# Altium PCB Capteur_Couleur.PcbDoc
Units mm, origin at the board's own origin, x right, y up, seen from the top; angles counter-clockwise.
Board outline 10.5 x 74.7 mm, 4 copper layers (Component Side, Ground Plane, Power Plane, Solder Side), stack 0.844 mm thick; 90 components, 63 nets, 286 pads, 137 vias.
Unrouted connection lines stored in the file: 4.
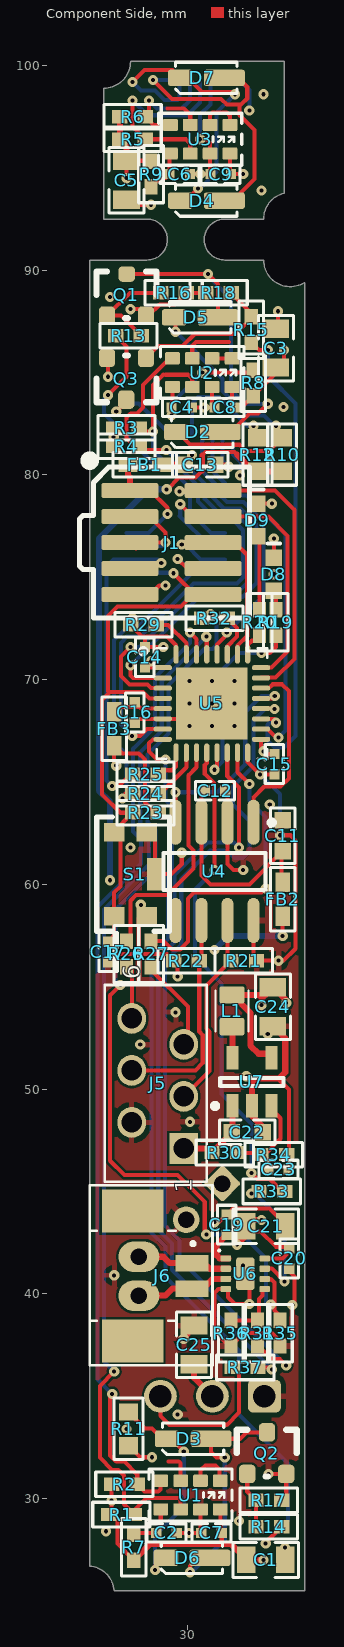
[diagram p0: Component Side view]
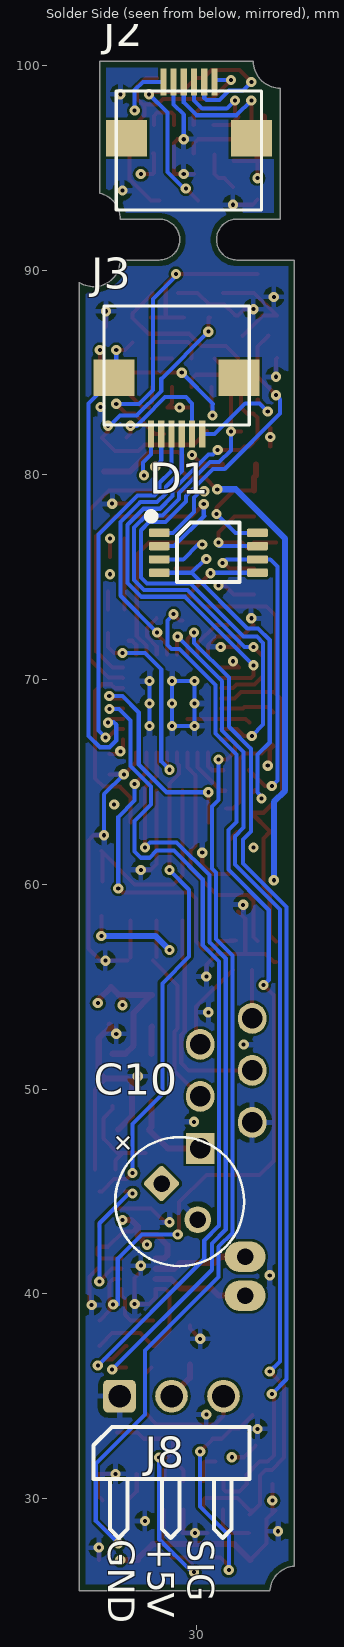
[diagram p1: Solder Side view, seen from below]
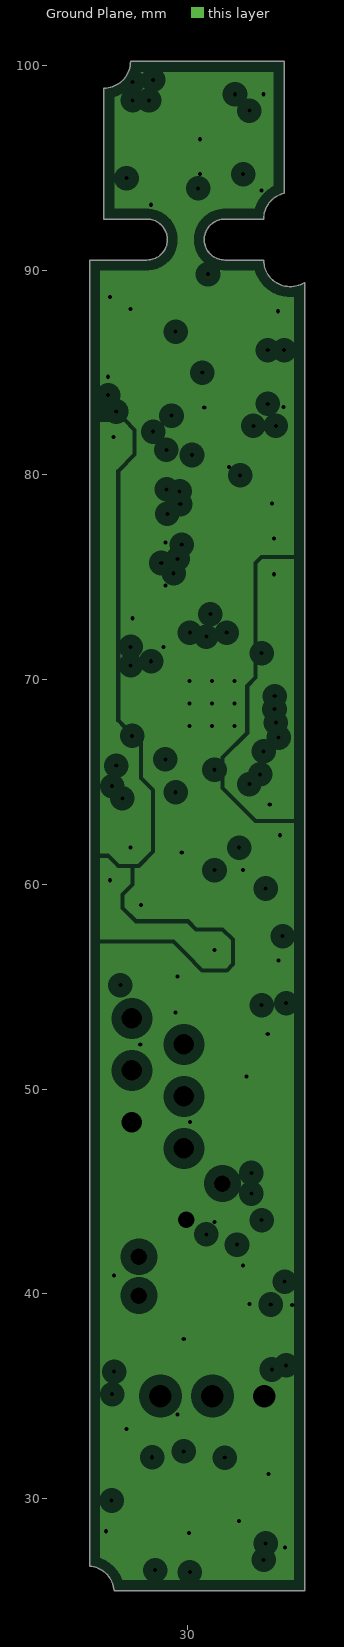
[diagram p2: Ground Plane, clearances drawn from the general rule]
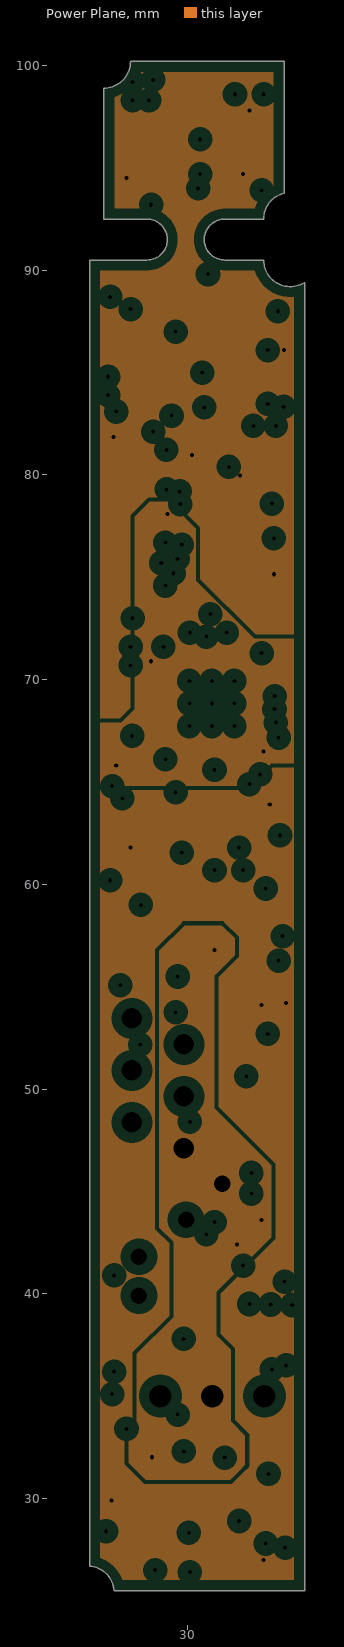
[diagram p3: Power Plane, clearances drawn from the general rule]
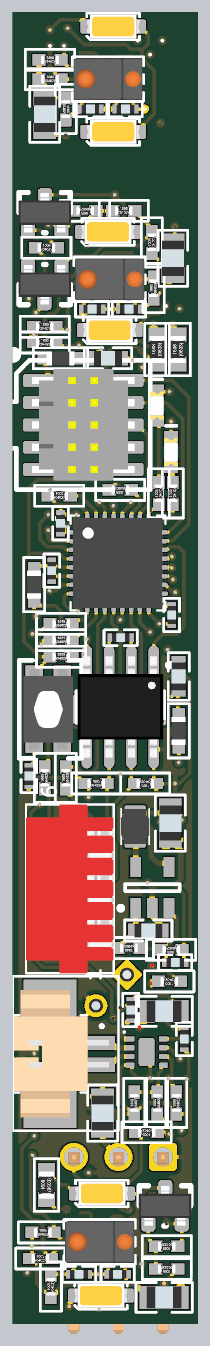
[diagram p4: 3D render of the assembled board from above, using the file's embedded part models]
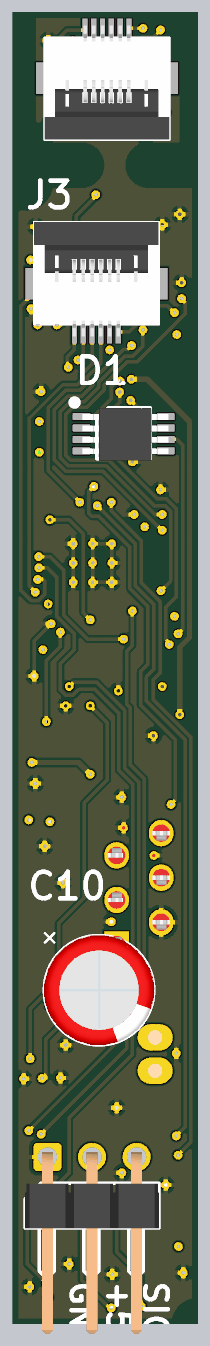
[diagram p5: 3D render of the assembled board from below, using the file's embedded part models]

## Layer stack, top to bottom
Top Solder: solder mask 0.0102, Solder Resist, Dk 3.5
Component Side: signal copper 0.0356
Dielectric 1: core 0.32, FR-4, Dk 4.8
Ground Plane: plane copper 0.036, net (Multiple Nets)
Dielectric 3: prepreg 0.127, Dk 4.2
Power Plane: plane copper 0.036, net (Multiple Nets)
Dielectric 4: core 0.254, Dk 4.2
Solder Side: signal copper 0.0356
Bottom Solder: solder mask 0.0102, Solder Resist, Dk 3.5

## Board outline
26.396,25.5 ccw(c25.1,25.4) 25.2,26.696 25.2,90.5 28,90.5 ccw(c28,91.5) 28,92.5 25.9,92.5 25.9,98.9 ccw(c25.9,100.2) 27.2,100.2 34.7,100.2 34.7,93.784 34.704,93.766 ccw(c35,92.5) 33.7,92.5 31.8,92.5 ccw(c31.8,91.5) 31.8,90.5 33.7,90.5 ccw(c35,90.5) 35.698,89.403 35.7,89.4 35.7,25.5

## Design rules (kind name [scope] priority, off if disabled: settings)
AssemblyTestPointUsage [All] p1 off:
AssemblyTestpoint [All] p1 off: testpointundercomponent=TRUE minsize=1.016 maxsize=2.54 preferedsize=1.524 minholesize=0 maxholesize=1.016 preferedholesize=0.813 testpointgrid=0.025 usegrid=TRUE gridtolerance=0 allowsidetop=TRUE allowsidebottom=TRUE
BoardOutlineClearance [All] p1: gap=0.3
Clearance [All] p1: gap=0.125
ComponentClearance [All] p1: gap=0.2 collisioncheckmode=3 verticalgap=1 showdistances=FALSE
DiffPairsRouting [All] p1 off: maxlimit=0.254 minlimit=0.254 mostfreqgap=0.254 toplayer_minwidth=0.381 toplayer_maxwidth=0.381 toplayer_prefwidth=0.381 bottomlayer_minwidth=0.381 bottomlayer_maxwidth=0.381 bottomlayer_prefwidth=0.381 maxuncoupledlength=12.7
FabricationTestPointUsage TestPointUsage [All] p1 off: valid=0 allowmultiple=FALSE
FabricationTestpoint Testpoint [All] p1 off: side=3 testpointundercomponent=TRUE minsize=1.016 maxsize=2.54 preferedsize=1.524 minholesize=0 maxholesize=1.016 preferedholesize=0.813 testpointgrid=0.025 allowsidetop=TRUE allowsidebottom=TRUE usegrid=TRUE gridtolerance=0
FanoutControl Fanout_BGA [IsBGA] p1 off: bgadir=Out bgaviamode=Centered fanoutstyle=Auto fanoutdirection=Alternating viagrid=0.025 // Fanout_BGA (Default Rule)
FanoutControl Fanout_LCC [IsLCC] p2 off: bgadir=Out bgaviamode=Centered fanoutstyle=Auto fanoutdirection=Alternating viagrid=0.025 // Fanout_LCC (Default Rule)
FanoutControl Fanout_SOIC [IsSOIC] p3 off: bgadir=Out bgaviamode=Centered fanoutstyle=Auto fanoutdirection=Alternating viagrid=0.025 // Fanout_SOIC (Default Rule)
FanoutControl Fanout_Small [(CompPinCount < 5)] p4 off: bgadir=Out bgaviamode=Centered fanoutstyle=Auto fanoutdirection=OutThenIn viagrid=0.025 // Fanout_Small (Default Rule)
FanoutControl Fanout_Default [All] p5 off: bgadir=Out bgaviamode=Centered fanoutstyle=Auto fanoutdirection=Alternating viagrid=0.025 // Fanout_Default (Default Rule)
Height [All] p1: minheight=0 maxheight=13 prefheight=10
HoleSize [All] p1: absolutevalues=TRUE maxlimit=6 minlimit=0.15 maxpercent=80.000 minpercent=20.000
HoleToHoleClearance [All] p1: gap=0.4 allowstackedmicrovias=TRUE
MinimumAnnularRing [All] p1: minimumring=0.15
MinimumSolderMaskSliver [All] p1: minsoldermaskwidth=0.15
MinimumSolderMaskSliver SilkscreenOverComponentPads [All] p2 off: minsoldermaskwidth=0.254
NetAntennae [All] p1 off: netantennaetolerance=0
PlaneClearance [All] p1: clearance=0.5
PlaneConnect [All] p1: planeconnectstyle=Relief reliefexpansion=0.4 reliefentries=4 reliefconductorwidth=0.3 reliefairgap=0.2
PolygonConnect [All] p1: connectstyle=Relief reliefconductorwidth=0.25 reliefentries=4 polygonreliefangle="90 Angle" airgapwidth=0.254
RoutingCorners [All] p1: cornerstyle=45-Degree minsetback=1.5 maxsetback=2.54
RoutingVias [All] p1: holewidth=0.2 width=0.5 viastyle="Through Hole" minholewidth=0.2 minwidth=0.4 maxholewidth=0.2 maxwidth=0.6
SilkToSilkClearance [All] p1 off: silktosilkclearance=0.1
SolderMaskExpansion [All] p1: expansion=0.075
Width [All] p1: maxlimit=4 minlimit=0.125 preferedwidth=0.2
10 further rules are at their usual default settings.

## Components (designator, comment, footprint, x,y, rotation, side; value= is the part's Value field where it differs from the comment)
C1 "10uF" "WCAP-CSGP_0805, 2x1.25x1.25" 33.8,27 r180 top
C2 "1uF" "WCAP-CSGP_0402, 1x0.5x0.5" 28.952,28.316 r180 top
C3 "10uF" "WCAP-CSGP_0805, 2x1.25x1.25" 34.3,86.2 r270 top
C4 "1uF" "WCAP-CSGP_0402, 1x0.5x0.5" 29.7,83.3 r180 top
C5 "10uF" "WCAP-CSGP_0805, 2x1.25x1.25" 27,94.4 r90 top
C6 "1uF" "WCAP-CSGP_0402, 1x0.5x0.5" 29.6,94.7 r180 top
C7 "1uF" "WCAP-CSGP_0402, 1x0.5x0.5" 31.153,28.316 r0 top
C8 "1uF" "WCAP-CSGP_0402, 1x0.5x0.5" 31.8,83.3 r0 top
C9 "1uF" "WCAP-CSGP_0402, 1x0.5x0.5" 31.6,94.7 r0 top
C10 "220 uF" WCAP-ATG8_6.3x11x2.5x0.5 30.8,44.5 r45 bottom
C11 "1uF" "WCAP-CSGP_0603, 1.6x0.8x0.8" 34.63,62.375 r270 top
C12 "100nF" "WCAP-CSGP_0402, 1x0.5x0.5" 31.33,64.575 r180 top
C13 "1uF" "WCAP-CSGP_0603, 1.6x0.8x0.8" 30.6,80.5 r180 top
C14 "100nF" "WCAP-CSGP_0402, 1x0.5x0.5" 27.9,71.1 r270 top
C15 "100nF" "WCAP-CSGP_0402, 1x0.5x0.5" 34.23,65.875 r90 top
C16 "100nF" "WCAP-CSGP_0402, 1x0.5x0.5" 27.4,68.4 r90 top
C17 "100nF" "WCAP-CSGP_0402, 1x0.5x0.5" 26.1,56.7 r90 top
C19 "100nF" "WCAP-CSGP_0402, 1x0.5x0.5" 31.904,43.375 r270 top
C20 "100nF" "WCAP-CSGP_0402, 1x0.5x0.5" 34.95,41.725 r90 top
C21 "10uF" "WCAP-CSGP_0805, 2x1.25x1.25" 33.8,43.3 r180 top
C22 "4.7uF" "WCAP-CSGP_0603, 1.6x0.8x0.8" 32.9,47.9 r180 top
C23 "100nF" "WCAP-CSGP_0402, 1x0.5x0.5" 34.43,46.075 r180 top
C24 "10uF" "WCAP-CSGP_0805, 2x1.25x1.25" 34.155,54.023 r90 top
C25 "10uF" "WCAP-CSGP_0805, 2x1.25x1.25" 30.3,37.5 r270 top
D1 "82401646" MSOP-8L 29.4,76.2 r180 bottom
D2 "158301227" WL-SWTP_3014 30.7,82.1 r0 top
D3 "158301227" WL-SWTP_3014 30.252,32.916 r0 top
D4 "158301227" WL-SWTP_3014 30.9,93.4 r0 top
D5 "158301227" WL-SWTP_3014 30.6,87.7 r0 top
D6 "158301227" WL-SWTP_3014 30.2,27.1 r0 top
D7 "158301227" WL-SWTP_3014 30.9,99.4 r0 top
D8 "Jaune" 0603 34.2,75.15 r270 top
D9 "Blue" 0603 33.4,77.8 r270 top
FB1 "742792624" "WE-CBF_0603_High Current" 27.9,80.5 r180 top
FB2 "742792624" "WE-CBF_0603_High Current" 34.63,59.275 r90 top
FB3 "742792624" "WE-CBF_0603_High Current" 26.4,67.6 r90 top
J1 "FTSH-105-01-L-DV-K" FTSH-105-01-L-DV-K 29.2,76.7 r270 top
J2 "687106149022" 687106149022 31.6,99.2 r180 bottom
J3 "687106149022" 687106149022 29.7,82 r0 bottom
J5 "690368170672" 690368170672 28.53,50.275 r90 top
J6 "653102131822" 653102131822 28.75,40.875 r270 top
J8 "61300311021" 61300311021 31.2,35 r180 bottom
L1 "74404020022" WE-LQS_2010 32.155,53.823 r90 top
Q1 "IRLML2502" SOT-23#1 27,88.8 r0 top
Q2 "IRLML2502" SOT-23#2 33.853,32.216 r0 top
Q3 "IRLML2502" SOT-23#2 27,84.7 r180 top
R1 "Manufacturer Part Number" RESC1005X04N 26.753,29.216 r0 top
R2 "Manufacturer Part Number" RESC1005X04N 26.9,30.7 r0 top
R3 "Manufacturer Part Number" RESC1005X04N 27,82.3 r0 top
R4 "Manufacturer Part Number" RESC1005X04N 27,81.4 r0 top
R5 "Manufacturer Part Number" RESC1005X04N 27.3,96.4 r0 top
R6 "Manufacturer Part Number" RESC1005X04N 27.3,97.5 r0 top
R7 "RC0402FR-0722RL" RESC1005X04N 27.353,27.616 r90 top
R8 "RC0402FR-0722RL" RESC1005X04N 33.2,84.5 r90 top
R9 "RC0402FR-0722RL" RESC1005X04N 28.2,94.7 r270 top
R10 "RC0603FR-0768RL" RESC1608X06N 34.6,81 r90 top
R11 "RC0603FR-0768RL" RESC1608X06N 27.1,33.4 r90 top
R12 "RC0603FR-0768RL" RESC1608X06N 33.4,81 r90 top
R13 "RC0402FR-0710RL" RESC1005X04N 27.1,86.8 r0 top
R14 "RC0402FR-0710RL" RESC1005X04N 33.953,28.616 r180 top
R15 "RC0402FR-0710RL" RESC1005X04N 33.1,87.1 r90 top
R16 "RC0402FR-0710KL" RESC1005X04N 29.3,88.9 r180 top
R17 "RC0402FR-0710KL" RESC1005X04N 33.953,29.916 r180 top
R18 "RC0402FR-0710KL" RESC1005X04N 31.5,88.9 r0 top
R19 "RC0402FR-07100RL" RESC1005X04N 34.3,72.8 r90 top
R20 "RC0402FR-0710RL" RESC1005X04N 33.5,72.8 r90 top
R21 "RC0402FR-0762RL" RESC1005X04N 32.73,56.275 r180 top
R22 "RC0402FR-0762RL" RESC1005X04N 29.93,56.275 r0 top
R23 "RC0402FR-0710KL" RESC1005X04N 27.93,63.5 r0 top
R24 "RC0402FR-0710RL" RESC1005X04N 27.93,64.438 r0 top
R25 "RC0402FR-0710RL" RESC1005X04N 27.93,65.375 r0 top
R26 "RC0402FR-0710RL" RESC1005X04N 27,56.6 r90 top
R27 "RC0402FR-0710RL" RESC1005X04N 28.2,56.6 r90 top
R29 "RC0402FR-0710KL" RESC1005X04N 27.83,72.675 r0 top
R30 "RC0402FR-0710KL" RESC1005X04N 31.8,46.9 r180 top
R31 "RC0402FR-0710RL" RESC1005X04N 33.404,38.075 r90 top
R32 "RC0402FR-0710RL" RESC1005X04N 31.3,73 r180 top
R33 "RC0402FR-0710RL" RESC1005X04N 34.1,45 r180 top
R34 "Manufacturer Part Number" RESC1005X04N 34.2,46.8 r180 top
R35 "RC0402FR-0710KL" RESC1005X04N 34.5,38.075 r90 top
R36 "RC0402FR-0710KL" RESC1005X04N 32.104,38.075 r90 top
R37 "RC0402FR-0710RL" RESC1005X04N 32.8,36.4 r180 top
S1 "MCITPG" MCIPTG23K-V 27.2,60.5 r270 top
U1 "APDS-9960" APDS996X 30.131,30.167 r90 top
U2 "APDS-9960" APDS996X 30.7,85 r90 top
U3 "APDS-9960" APDS996X 30.6,96.4 r90 top
U4 "MCP2551-I/SN" SO8_N 31.3,60.635 r270 top
U5 "STM32F302K8U6" QFN50P500X500X60_HS-33N 31.173,68.837 r0 top
U6 "DRV8838DSGT" PSON50P200X80_HS-9N 32.804,40.975 r0 top
U7 "LM3671MF-3.3/NOPB" SOT23-5 33.13,50.35 r90 top

## Footprints (in the part's own frame and the unit in brackets; to place one, negate y for a bottom-side part, rotate by r counter-clockwise, add the part's x,y. Pads: shape width x height; smd on the part's side, far side on the other; paste and mask are expansions set on the pad)
0603 [mm] "Chip LED, 2-Leads, Body 1.6x0.8mm, IPC Medium Density"
  rect 0.8x0.8 smd: 1(-0.8,0) 2(0.8,0)
  silkscreen extent -1.5,-0.3 -1.5,0.3, body extent -0.8,-0.4 0.8,0.4, height 0.7
61300311021 [mm] "3 pins, 1 row, right angled, gold plating"
  rrect30% 1.6x1.6 hole 1.1: 1(-2.54,0)
  round 1.6 hole 1.1: 2(0,0) 3(2.54,0)
  silkscreen extent -3.81,-6.92 3.81,-1.5, body extent -3.81,-10.06 3.81,0.3, height 2.55
653102131822 [mm] "SMT Male Horizontal Shrouded Header - 02p 1 row - T & R packaging"
  rect 0.81x1.6 smd: 1(-0.625,1.45) 2(0.625,1.45)
  rect 2.1x3 smd: Z1(-3.175,-1.45) Z2(3.175,-1.45)
  silkscreen extent -4.43,-3.55 4.38,2.45, body extent -3.62,-3.5 3.63,1.91, height 3.38
687106149022 [mm] "WR-FPC 0.50mm SMT Horiz. Bot. Contact Hinge type WR-FPC 0.50mm 6pins Hinge type SMT Horizontal Bottom Contact"
  rect 0.3x1.3 smd: 1(0,0) 2(0.5,0) 3(1,0) 4(1.5,0) 5(2,0) 6(2.5,0)
  rect 2x1.8 smd: Z1(-1.8,-2.75) Z2(4.3,-2.75)
  silkscreen extent -2.3,-6.25 4.8,-0.45, body extent -2.3,-6.25 4.8,0.25, height 2.25
690368170672 [mm] "without Latch, 6 pins, right angled"
  rect 1.5x1.4 hole 1: 1(-3.175,-1.27)
  oval 1.5x1.4 hole 1: 2(-1.905,1.27) 3(-0.635,-1.27) 4(0.635,1.27) 5(1.905,-1.27) 6(3.175,1.27)
  silkscreen extent -4.81,-2.4 4.81,2.6, body extent -4.81,-2.4 4.81,2.6, height 5.9
APDS996X [mm]
  rrect20% 0.6x0.72 smd: 1(0.7,1.455) 2(0.7,0.485) 3(0.7,-0.485) 4(0.7,-1.455) 5(-0.7,-1.455) 6(-0.7,-0.485) 7(-0.7,0.485) 8(-0.7,1.455)
  silkscreen extent -1.27,-2.03 1.27,2.03, body extent -1.18,-1.97 1.18,1.97, height 1.34
FTSH-105-01-L-DV-K [mil] "CONN HEADER 10 POS DUAL .05\" SMD"
  rrect30% 29x110 smd mask+2: 1(-100,-80) 2(-100,80) 3(-50,-80) 4(-50,80) 5(0,-80) 6(0,80) 7(50,-80) 8(50,80) 9(100,-80) 10(100,80)
  silkscreen extent -165,-177 145,150, body extent -125,-115 125,115, height 241
MCIPTG23K-V [mm]
  rect 0.9x1 smd: 1(-2.05,0.8) 2(-2.05,-0.8) 3(2.05,0.8) 4(2.05,-0.8)
  rect 1.6x0.8 smd: 5(0,1.2)
  silkscreen extent -2.79,-1.65 2.79,1.91, body extent -2.3,-1.4 2.3,1.4, height 1.9
MSOP-8L [mm] "MSOP-8L, 8-Leads, Body 5x3mm, Pitch 0.5mm"
  rrect30% 1.016x0.406 smd: 1(-2.4,0.975) 2(-2.4,0.325) 3(-2.4,-0.325) 4(-2.4,-0.975) 5(2.4,-0.975) 6(2.4,-0.325) 7(2.4,0.325) 8(2.4,0.975)
  silkscreen extent -2.89,-1.43 1.52,1.88, body extent -2.35,-1.52 2.55,1.48, height 0.94
PSON50P200X80_HS-9N [mm] "PSON, 8-Leads, Body 2,00x2,00mm, Pitch 0,50mm, Thermal Pad 1,60x0,82mm, IPC Medium Density"
  rrect30% 0.5x0.3 smd: 1(-0.95,0.75) 2(-0.95,0.25) 3(-0.95,-0.25) 4(-0.95,-0.75) 5(0.95,-0.75) 6(0.95,-0.25) 7(0.95,0.25) 8(0.95,0.75)
  rrect30% 0.9x1.6 smd: 9(0,0)
  silkscreen extent -1.32,1.09 -1.22,1.19, body extent -1.05,-1.05 1.05,1.05, height 0.8
QFN50P500X500X60_HS-33N [mm] "QFN, 32-Leads, Body 5,00x5,00mm, Pitch 0,50mm, Thermal Pad 3,50x3,50mm, IPC Medium Density"
  oval 0.9x0.25 smd: 1(-2.4,1.75) 2(-2.4,1.25) 3(-2.4,0.75) 4(-2.4,0.25) 5(-2.4,-0.25) 6(-2.4,-0.75) 7(-2.4,-1.25) 8(-2.4,-1.75) 17(2.4,-1.75) 18(2.4,-1.25) 19(2.4,-0.75) 20(2.4,-0.25) 21(2.4,0.25) 22(2.4,0.75) 23(2.4,1.25) 24(2.4,1.75)
  oval 0.25x0.9 smd: 9(-1.75,-2.4) 10(-1.25,-2.4) 11(-0.75,-2.4) 12(-0.25,-2.4) 13(0.25,-2.4) 14(0.75,-2.4) 15(1.25,-2.4) 16(1.75,-2.4) 25(1.75,2.4) 26(1.25,2.4) 27(0.75,2.4) 28(0.25,2.4) 29(-0.25,2.4) 30(-0.75,2.4) 31(-1.25,2.4) 32(-1.75,2.4)
  rect 3.5x3.5 smd: 33(0,0)
  silkscreen extent -3.47,-2.7 2.7,2.7, body extent -2.57,-2.57 2.57,2.57, height 0.6
RESC1005X04N [mm] "Chip Resistor, 2-Leads, Body 1,1x0,5mm, IPC Medium Density"
  rect 0.75x0.65 smd: 1(-0.625,0) 2(0.625,0)
  silkscreen extent -1.4,-0.6 1.4,0.6, body extent -0.5,-0.25 0.5,0.25, height 0.35
RESC1608X06N [mm] "Chip Resistor, 2-Leads, Body 1,6x0,8mm, IPC Medium Density"
  rect 0.85x0.95 smd: 1(-0.825,0) 2(0.825,0)
  silkscreen extent -1.5,-0.7 1.5,0.7, body extent -0.77,-0.42 0.78,0.43, height 0.45
SO8_N [mm] "8-Pin Small Outline Integrated Circuit 1.27 mm Pitch, IPC Medium Density"
  oval 2.2x0.6 smd: 1(-2.4,1.905) 2(-2.4,0.635) 3(-2.4,-0.635) 4(-2.4,-1.905) 5(2.4,-1.905) 6(2.4,-0.635) 7(2.4,0.635) 8(2.4,1.905)
  silkscreen extent -2.51,-2.5 0.9,2.92, body extent -2.89,-2.45 2.89,2.46, height 1.75
SOT23-5 [mm] "SOT23, 5-Leads, Body 3,1x3,2mm (max), Pitch 0,95mm, IPC Medium Density"
  rect 1.15x0.6 smd: 1(-1.175,0.95) 2(-1.175,0) 3(-1.175,-0.95) 4(1.175,-0.95) 5(1.175,0.95)
  silkscreen extent -1.3,-1.55 0.2,1.92, body extent -0.9,-1.55 0.9,1.55, height 1.45
SOT-23#1 [mm]
  rrect50% 0.8x0.9 smd: 1(-0.953,-1.016) 2(0.953,-1.016)
  rrect50% 0.8x0.76 smd: 3(0.013,1.016)
  silkscreen extent -1.46,-1.14 1.46,1.14, body extent -1.5,-1.13 1.5,1.13, height 1.22
SOT-23#2 [mm]
  rrect50% 0.8x0.9 smd: 1(-0.953,-1.016) 2(0.953,-1.016) 3(0.013,1.016)
  silkscreen extent -1.46,-1.14 1.46,1.14, body extent -1.5,-1.13 1.5,1.13, height 1.22
WCAP-ATG8_6.3x11x2.5x0.5 [mm] "Polarized capacitors, Aluminum Electrolytic Capacitors, 2-Leads, Body 6.3x11x2.5x0.5"
  rrect20% 1.3x1.3 hole 0.8: 1(1.25,0)
  round 1.3 hole 0.8: 2(-1.25,0)
  silkscreen extent -3.15,-3.15 3.15,3.15, body extent -3.14,-3.15 3.15,3.15, height 11.11
"WCAP-CSGP_0402, 1x0.5x0.5" [mm] "WCAP-CSGP Ceramic Capacitors, size 0402, body 1x0.5x0.5"
  rect 0.5x0.5 smd: 1(-0.5,0) 2(0.5,0)
  silkscreen extent -0.95,-0.45 0.95,0.45, body extent -0.5,-0.25 0.5,0.25, height 0.5
"WCAP-CSGP_0603, 1.6x0.8x0.8" [mm] "WCAP-CSGP Ceramic Capacitors, size 0603, body 1.6x0.8x0.8"
  rect 0.8x0.8 smd: 1(-0.75,0) 2(0.75,0)
  silkscreen extent -1.35,-0.6 1.35,0.6, body extent -0.8,-0.4 0.8,0.4, height 0.8
"WCAP-CSGP_0805, 2x1.25x1.25" [mm] "WCAP-CSGP Ceramic Capacitors, size 0805, body 2x1.25x1.25"
  rect 0.9x1.3 smd: 1(-0.95,0) 2(0.95,0)
  silkscreen extent -1.6,-0.85 1.6,0.85, body extent -1,-0.62 1,0.63, height 1.22
"WE-CBF_0603_High Current" [mm] "SMD EMI Suppression Ferrite  Bead, body 1.6mmx0.8mm"
  rect 0.95x0.7 smd: 1(-0.825,0) 2(0.825,0)
  silkscreen extent -1.55,-0.6 1.55,0.6, body extent -0.8,-0.4 0.8,0.4, height 0.8
WE-LQS_2010 [mm] "SMD Power Inductor, 2-Leads, body 1.6x2.0mm"
  rrect20% 0.85x1.2 smd: 1(-0.775,0) 2(0.775,0)
  silkscreen extent -1,-0.8 1,0.8, body extent -1,-0.8 1,0.82, height 1
WL-SWTP_3014 [mm] "SMD White Top view PLCC, body 3x1.4"
  rrect30% 2x0.8 smd: 1(0.88,0)
  rrect30% 1.2x0.8 smd: 2(-1.27,0)
  silkscreen extent -1.5,-0.76 1.5,0.76, body extent -1.5,-0.7 1.5,0.7, height 0.85

## Part data
C1 C3 C5 C21 C24 C25: library part "WCAP-CSGP, 885012207026", "CAP CER 10uF 10V X7R 0805"
C2 C4 C6 C7 C8 C9: library part "WCAP-CSGP, 885012105012", "CAP CER 1UF 10V X5R 0402"
C10: library part "WCAP-ATG8, 860010373010", "CAP Alu 220 UF 20% 16 V"
C11 C13: library part "WCAP-CSGP, 885012206076", "CAP CER 1uF 25V X7R 0603"
C12 C14 C15 C16 C17 C19 C20 C23: library part "WCAP-CSGP, 885012205037", "CAP CER 100nF 16V X7R 0402"
C22: library part "WCAP-CSGP, 885012106012", "CAP CER 4.7UF 10V X5R 0603"
D1: "TVS DIODE 5VWM 13VC 8MSOP"
D2 D3 D4 D5 D6 D7: "LED WL-SWTP WARM WHT 2700K 1206"
D8: library part "WL-SMCW 0603  150060YS75000", "SMD mono-color Chip LED, WL-SMCW, Yellow"
D9: library part "WL-SMCW 0603  150060BS75000", "SMD mono-color Chip LED, WL-SMCW, Blue"
FB1 FB2 FB3: library part "WE-CBF, 742792624", "Ferrite Bead 180ohm 0603 max1.5A"
J1: "CONN HEADER 10 POS DUAL .05\" SMD with Keying"
J2 J3: "CONN .5MM HORZ BOTTOM SMD 6POS"
J5: "WR-MM 6p Female Angled TH Connector with Polarization"
J6: "WR-WTB 2 horiz. 1.25mm"
J8: "CONN HEADER 3p horiz. 2.54mm"
L1: "FIXED IND 2.2UH 960MA 220 MOHM"
Q1 Q2 Q3: "MOSFET CANAL N SOT-23"
R1 R2 R3 R4 R5 R6 R34: library part RC0402FR-074K7L, "RES SMD 4K7 OHM 1% 1/16W 0402"
R7 R8 R9: "RES SMD 22 OHM 1% 1/16W 0402"
R10 R11 R12: "RES SMD 68 OHM 1% 1/10W 0603"
R13 R14 R15 R20 R24 R25 R26 R27 R31 R32 R33 R37: "RES SMD 10 OHM 1% 1/16W 0402"
R16 R17 R18 R23 R29 R30 R35 R36: "RES SMD 10K OHM 1% 1/16W 0402"
R19: "RES SMD 100 OHM 1% 1/16W 0402"
R21 R22: "RES SMD 62 OHM 1% 1/16W 0402"
S1: library part MCIPTG23K-V, "Switch MCIPTG23K-V Multicomp"
U1 U2 U3: library part APDS9960, "Digital Proximity, Ambient Light, RGB and Gesture Sensor"
U4: "IC TRANSCEIVER CAN HI-SPD 8-SOIC"
U6: "IC BRIDGE DRIVER PAR 8WSON"
U7: "IC REG BUCK 3.3V 0.6A SYNC SOT23"

## Free pads (board coordinates)
  oval 2x1.5 hole 0.8: 3(27.604,39.911) 3(27.604,41.811)

## Via types
v1: diameter 0.5, hole 0.2, Component Side to Solder Side, tented top, 135 vias
v2: diameter 0.5, hole 0.2, Component Side to Solder Side, 2 vias

## Nets (pads, with @x,y where several pads share a name; then routed paths per layer and width w, separated by ;. In a path a pad name is that pad's centre, name@x,y a point inside that pad or via, vN(x,y) a via of type N, cw(c..) or ccw(c..) an arc to the next point about the centre after c; other vN are vias at no path point)
3L: C1.2 C3.2 C5.2 C7.2 C8.2 C9.2 C13.2 C24.2 FB1.1 J2.1 J3.6 L1.2 R1.1 R2.1 R3.1 R4.1 R5.1 R6.1 R7.1 R8.1 R9.1 U1.5 U2.5 U3.5 U7.4 | length 38.4
  Component Side w0.2: R1.1@26.128,29.416 26.553,28.991 26.553,27.791 R7.1 ; R1.1@26.275,29.363 v1(26.275,29.9) R2.1 ; R4.1 R3.1 ; v1(27,94.5) C5.2 R9.1@28.175,95.35 ; C13.2@29.75,80.5 29.75,80.55 30.196,80.996 30.2,80.991 v1(30.2,80.975) ; U1.5 31.586,28.383 C7.2 31.652,27.823 ; C9.2@32.055,94.745 U3.5 U3.5@32.1,95.7 ; C9.2 v2(32.7,94.7) ; C8.2@32.155,83.545 U2.5 ; C8.2 32.3,83.325 32.65,83.325 R8.1 C3.2@34.187,84.862 ; C3.2 34.7,85.65 v1(34.7,86.1)
  Component Side w0.3: R6.1 R5.1 27,96.075 C5.2 ; R7.1 28.137,27.775 32.124,27.775 32.85,27.049 C1.2 v1(33.7,27) ; FB1.1 C13.2@29.7,80.5 ; C13.2@29.725,80.385 C13.2@29.725,80.5 ; L1.2 L1.2@32.18,54.598 ; v1(33.6,54.1) 33.6,54.418 C24.2@33.78,54.598 ; U7.4@34.08,51.725 33.453,51.725 33.055,52.123 33.055,53.723 L1.2@32.18,54.598 ; v1(34.8,54.2) 34.8,54.328 C24.2 C24.2@33.78,54.598 ; L1.2@32.18,54.598 C24.2@33.78,54.598
  Solder Side w0.2: J2.1 32.6,99.2 33,98.8 v1(33,97.8) ; J3.6 32.2,81 32.6,80.6 32.6,80.1 32.55,80.05 v1(32.55,79.983)
  other v1: 27.2,61.8 34,63.9 34.2,75.15 26.375,81.85
3L_UC: C14.2 C15.2 D1.8 FB1.2 FB3.1 J1.1 R23.2 U5.1 U5.17 | length 14.9
  Component Side w0.2: FB3.1@26.327,66.848 26.23,66.75 26.4,66.58 v1@26.4,65.7 ; FB3.1 26.425,66.775 26.8,66.4 27.6,66.4 27.905,66.095 27.905,63.995 28.2,63.7 R23.2@28.525,63.7 ; J1.1 28.16,79.24 29,78.4 v1(29,78.1) ; C14.2@27.9,70.587 U5.1 ; C14.2 v1(28.2,70.9) ; v1@28.2,71 v1(28.2,70.9) ; v1@28.2,71 28.3,71 v1(28.2,70.9) ; U5.17 33.573,66.627 v1(33.7,66.5) 33.825,66.375 C15.2
  Component Side w0.3: FB1.2 27.075,79.975 27.168,79.882 J1.1
  Solder Side w0.2: D1.8 28.075,77.175 v1(29,78.1)
  other v1: 26.5,65.8
5L: C10.1 C19.2 C20.2 C21.2 C22.2 C25.2 FB2.1 J5.1 J8.2 R10.1 R11.1 R12.1 R30.2 U6.1 U6.8 U7.1 | length 49.2
  Component Side w0.2: R11.1 27.659,32.016 v1(28.253,32.016) ; v1(28.965,79.3) 29,79.3 29.575,79.875 30.375,79.875 30.7,80.2 ; 30.7,80.968 30.857,81.125 32.275,81.125 32.4,81 ; C21.2 33.1,43.05 33.55,43.05 34.3,42.3 34.75,42.3 34.825,42.225 34.825,41.925 34.625,41.725 U6.8@33.639,41.725 ; v1(34.63,57.475) FB2.1
  Component Side w0.25: 30.7,80.2 30.7,80.968
  Component Side w0.3: J5.1 31.382,47.1 32.305,48.023 32.18,48.148 U7.1@32.18,49.375 ; C25.2 30.3,35.9 J8.2 ; U6.1@31.969,41.725 31.554,41.725 31.404,41.875 31.404,42.375 C19.2 C21.2@32.654,42.875 ; v1(32.4,42.4) 32.85,42.85 C21.2 33.15,43.6 v1(33.6,43.6) ; 32.4,81 33.225,80.175 R12.1 R10.1@34.5,80.175
  Solder Side w0.2: v1(28.965,79.3) v1@29,79.265 ; v1@31.3,56.7 v1(31.3,56.8)
  Solder Side w0.3: v1(26.2,60.2) 26.2,64.033 25.65,64.583 25.65,76.889 28.061,79.3 v1(28.965,79.3) ; v1(31.3,56.8) 31.975,57.475 v1(34.63,57.475)
A_DEL_CC1: D3.2 D6.2 R11.2 | length 10.7
  Component Side w0.2: R11.2@27.253,34.066 27.902,33.416 28.253,33.416 28.753,32.916 D3.2 29.184,32.916 v1(29.8,32.3) ; v1(28.4,26.5) 28.4,26.7 28.816,27.116 D6.2@29.083,27.116
  Solder Side w0.2: v1(28.4,26.5) 28.4,28.2 29.8,29.6 v1(29.8,32.3)
A_DEL_CC2: D2.2 D5.2 R10.2 | length 14.4
  Component Side w0.2: v1(29.4,87) 29.4,87.63 D5.2 D5.2@29.4,87.7 ; D2.2@29.465,82.135 30.125,81.475 32.525,81.475 32.825,81.175 33.968,81.175 34.6,81.807 R10.2 34.3,82.125 v1@34.3,82.325
  Solder Side w0.2: v1(29.4,87) 31.7,84.7 31.7,84.1 32.9,82.9 33.725,82.9 v1@34.3,82.325
  other v1: 34.3,82.4
A_DEL_CC3: D4.2 D7.2 J2.5 J3.2 R12.2 | length 21.4
  Component Side w0.2: v1(27.3,99.2) 27.875,99.775 29.255,99.775 D7.2 30,99.4 30.7,98.7 32.3,98.7 v1(32.3,98.6) ; D4.2@29.9,93.4 v1(30.5,94) ; v1(33.2,82.4) 33.2,82.025 R12.2
  Solder Side w0.2: v1(27.3,99.2) 27.718,98.782 28.4,98.782 28.857,98.325 29.5,98.325 29.6,98.425 J2.5 ; J3.2 30.2,83.5 30.5,83.8 31.518,83.8 32.575,82.743 32.575,82.725 32.9,82.4 v1(33.2,82.4) ; v1(30.5,94) 30.6,94 31.4,94.8 31.4,97.7 v1(32.3,98.6)
BOOT0: R29.2 U5.31 | length 2.4
  Component Side w0.2: R29.2 29.03,72.675 29.923,71.782 U5.31
CANH: J5.3 R21.2 U4.7 | length 9.5
  Component Side w0.2: J5.3 31.05,50.89 31.05,52.8 30.9,52.95 30.9,55.07 R21.2 ; R21.2@31.935,56.445 U4.7
CANL: J5.4 R22.2 U4.6 | length 10.5
  Component Side w0.2: J5.4 30.365,50.91 30.725,51.27 30.725,52.65 30.555,52.82 R22.2 ; R22.2@30.665,56.385 U4.6
CC_CANRX: U4.4 U5.21 | length 10.5
  Component Side w0.2: U4.4 29.395,64.495 v1(29.4,64.5) ; U5.21 34.242,69.087 v1(34.242,69.2)
  Solder Side w0.2: v1(29.4,64.5) 31.45,64.5 32.8,65.85 32.8,68.4 33.6,69.2 v1(34.242,69.2)
CC_CANTX: U4.1 U5.22 | length 9.2
  Component Side w0.2: U4.1 33.205,64.25 33.73,64.775 34.53,64.775 34.93,65.175 34.93,69.447 34.602,69.775 34.145,69.775 33.957,69.587 U5.22
CC_NRST: C17.2 D1.5 J1.10 R23.1 S1.2 S1.4 U5.4 | length 30
  Component Side w0.2: C17.2 26.375,57.475 ; S1.2@26.346,62.541 R23.1 26.7,63.5 25.8,64.4 25.8,69 26.175,69.375 ; 26.4,57.5 S1.4 26.4,59.6 26.7,59.9 26.7,62.25 S1.2 ; U5.4 28.118,69.087 27.805,69.4 26.2,69.4 26.175,69.375 ; v1(29.3,75.2) J1.10@30.44,74.06 ; J1.10@31.232,74.06 J1.10@30.44,74.06 ; 26.175,69.375 26.1,69.45 26.1,73.1 26.567,73.567 29.667,73.567 30.16,74.06 J1.10@30.44,74.06
  Solder Side w0.2: D1.5 29.275,75.225 v1(29.3,75.2)
CC_SWCLK: D1.2 J1.4 U5.24 | length 16.6
  Component Side w0.2: v1(29.625,78.575) 30.23,77.97 J1.4 33.93,77.97 34.875,77.025 34.875,71.375 34.087,70.587 U5.24
  Solder Side w0.2: v1(29.625,78.575) 29.625,78.025 29.6,78 31.075,76.525 D1.2
CC_SWDIO: D1.1 J1.2 U5.23 | length 19.1
  Component Side w0.2: v1(29.6,79.2) 29.48,79.2 29.44,79.24 J1.2 34.26,79.24 35.2,78.3 35.2,71.015 34.285,70.1 33.586,70.1 U5.23
  Solder Side w0.2: v1(29.6,79.2) v1@29.8,79.2 ; v1@29.8,79.2 30.1,78.9 30.1,78.2 31.125,77.175 D1.1
CC_SWO: D1.3 J1.6 U5.26 | length 11.4
  Component Side w0.2: v1(29.7,76.6) 29.7,76.5 29.6,76.6 29.7,76.7 J1.6 32.3,76.7 32.9,76.1 32.9,72.14 32.423,71.663 U5.26
  Solder Side w0.2: v1@29.6,76.7 v1(29.7,76.6) 29.9,76.6 30.625,75.875 D1.3
CC_SWRX: D1.6 J1.7 R25.1 | length 16.8
  Component Side w0.2: v1(26.3,64.8) 26.63,64.8 R25.1@27.405,65.575 ; J1.7 28.37,75.43 28.64,75.7 v1(28.7,75.7)
  Solder Side w0.2: v1(26.3,64.8) 26.025,65.075 26.025,75.525 26.375,75.875 D1.6 28.525,75.875 v1(28.7,75.7)
CC_SWTX: D1.4 J1.8 R24.1 | length 18.4
  Component Side w0.2: v1@26.7,64.2 26.73,64.2 27.13,64.6 27.23,64.5 R24.1@27.305,64.575 ; v1(29.5,75.9) 29.97,75.43 J1.8@31,75.43
  Solder Side w0.2: v1@26.7,64.2 27,64.5 27,66.34 26.4,66.94 26.4,71.931 26.969,72.5 27.5,72.5 30.225,75.225 ; v1(29.5,75.9) 29.55,75.9 30.225,75.225 ; D1.4 30.225,75.225
  other v1: 26.8,64.2
CMD_SERVO: R37.1 U5.14 | length 36.3
  Component Side w0.2: U5.14 31.923,65.3 32.5,64.723 v1(32.5,61.8) ; R37.1 34,36.4 v1(34.1,36.3)
  Solder Side w0.2: v1(32.5,61.8) 32.25,62.05 30.95,62.05 29.35,60.45 29.35,57.175 28.55,56.375 28.55,43.135 29.225,42.46 29.225,41.175 v1(34.1,36.3)
DEL_CC1: R14.1 U5.8 | length 45.3
  Component Side w0.2: U5.8 28.287,67.087 28.1,66.9 28.1,66.5 28.3,66.3 28.497,66.103 v1(28.901,66.103) ; v1(33.8,27.8) 33.8,27.839 R14.1
  Solder Side w0.2: v1(28.901,66.103) 28.901,64.124 29.225,63.8 29.225,60.785 29.025,60.585 29.025,57.326 28.225,56.526 28.225,42.975 28.9,42.3 28.9,40.825 32.5,37.225 32.5,34.1 34.9,31.7 34.9,28.9 v1(33.8,27.8)
DEL_CC2: R13.1 U5.7 | length 29.8
  Component Side w0.2: v1(26.1,83.9) 27,84.8 27,86.275 R13.1 ; v1(27.276,67.253) 27.666,67.253 28,67.587 U5.7
  Solder Side w0.2: v1(26.1,83.9) 25.9,83.7 25.9,83 28.6,80.3 29.181,80.3 30.5,78.981 30.5,78.7 31.5,77.7 32.3,77.7 32.7,77.3 32.7,75 32.4,74.7 30.281,74.7 27.681,72.1 27.028,72.1 26.725,71.797 26.725,67.805 v1(27.276,67.253)
DEL_CC3: J3.Z2 R15.1 U5.19 | length 24.2
  Component Side w0.2: R15.1 33.475,86.1 v1(33.9,86.1) ; U5.19 34.218,68.087 34.3,68.005 34.195,67.9 v1(34.3,67.9)
  Solder Side w0.2: J3.Z2@33.9,84.85 v1(33.9,86.1) ; J3.Z2 35.25,83.5 35.25,67.25 34.7,66.7 34.233,66.7 33.9,67.033 33.9,67.8 34.03,67.93 34.06,67.9 v1(34.3,67.9)
GND: C1.1 C2.1 C3.1 C4.1 C5.1 C6.1 C7.1 C8.1 C9.1 C10.2 C11.1 C12.1 C13.1 C14.1 C15.1 C16.1 C17.1 C19.1 C20.1 C21.1 C22.1 C23.1 C24.1 C25.1 D1.7 D8.1 D9.1 J1.3 J1.5 J1.9 J2.2 J3.5 J5.2 J8.1 Q1.2 Q2.2 Q3.2 R16.1 R17.1 R18.1 R21.1 R22.1 R29.1 R34.1 R35.1 R36.1 S1.1 S1.3 S1.5 U1.6 U2.6 U3.6 U4.2 U4.8 U5.6 U5.16 U5.32 U5.33 U6.4 U6.9 U7.2 | length 111.8
  Component Side w0.2: Q3.2 26.1,85.663 v1(26.1,84.8) ; C17.1 26.2,56.2 26.6,56.6 27.6,56.6 ; J1.5@26.1,76.7 J1.5 27.468,76.4 27.768,76.7 v1(28.9,76.7) 28.9,77.2 28.13,77.97 J1.3 ; C5.1 27.25,93.2 v1(28.2,93.2) ; J1.9 28.16,74.16 28.6,74.6 v1(28.9,74.6) ; v1@27.2,73.1 v1(27.3,73) ; v1(27.2,88.1) 27.637,88.1 Q1.2 28.084,87.784 28.625,88.325 29.35,88.325 R16.1 R18.1 ; R29.1 27.768,72.112 28.993,72.112 29.423,71.682 U5.32 ; C16.1 27.587,68.087 U5.6 U5.33@30.423,68.087 ; S1.3@27.7,58.75 v1(27.7,59) ; 27.9,72.012 C14.1 v1(28.8,71.6) ; S1.3@27.946,58.682 27.6,58.336 27.6,56.6 ; S1.1 28.4,62.15 S1.5 29.2,60.5 29.7,61 v1(29.7,61.55) ; C2.1 v1(30.053,28.316) C7.1 ; v1(29.5,55.5) 29.5,56.08 R22.1 28.98,56.6 27.6,56.6 ; v1(29.8,37.8) 30.3,38.3 C25.1 ; C6.1 v1(30.6,94.7) C9.1 ; C4.1@30.3,83.3 v1(30.8,83.3) 31.4,83.3 31.185,83.515 U2.6 ; v1(30.6,96.4) 30.9,96.4 31.085,96.215 U3.6 C9.1@31.085,94.715 ; C7.1@30.616,28.353 U1.6 ; C13.1@31.225,80.5 v1@32,80.5 ; v1(31.3,43.5) 31.529,43.5 C19.1 32.204,44.175 33.997,44.175 34.75,43.422 C21.1 ; C12.1@31.935,64.575 U4.2 31.935,60.99 32.225,60.7 v1(32.7,60.7) ; v1(32,80.4) v1@32,80.525 ; R36.1@32.004,37.45 31.304,38.15 31.304,40.045 31.484,40.225 31.969,40.225 31.969,39.831 32.3,39.5 v1(33,39.5) 33,40.779 U6.9 ; R36.1 32.729,38.075 34.104,38.075 34.704,37.475 R35.1@34.704,37.45 ; U5.16 32.923,65.982 v1(33.53,65.375) C15.1 ; R21.1@33.205,56.425 U4.8 ; R21.1 v1(34.43,56.275) 34.675,56.275 35.255,56.855 35.255,62.153 35.008,62.4 v1(34.5,62.4) C11.1@34.5,62.995 ; D9.1 v1(34.1,78.6) ; v1(33.937,31.2) Q2.2 34.805,30.144 R17.1 ; D8.1@34.2,76 v1(34.2,76.9) ; C3.1@34.4,87.25 v1(34.4,88) ; 34.455,50.523 34.455,50.45 34.93,49.975 C23.1 ; C1.1 v2(34.75,27.6) ; C20.1@34.825,41.225 35.202,40.848 v1@35.202,39.452
  Component Side w0.3: v1(32.855,50.623) 33.13,50.348 33.13,50.298 ; C22.1@33.805,48.023 33.13,48.698 33.13,50.298 ; v1(33.9,52.7) 33.9,52.818 C24.1@34.23,53.148 ; C24.1 34.755,52.473 34.755,50.823 34.455,50.523 33.355,50.523 33.13,50.298
  Solder Side w0.2: D1.7 v1@28.875,76.525 ; v1(30.6,96.4) 30.6,97.6 31.1,98.1 J2.2 ; J3.5 31.7,80.7 v1(32,80.4) ; v1(32.273,67.737) v1(32.273,68.837) v1(32.273,69.937) ; v1(33.53,65.375) 34.5,64.405 v1(34.5,62.4) ; v1(30.073,67.737) v1(30.073,68.837) v1(30.073,69.937) v1(31.173,69.937) v1(31.173,68.837) v1(31.173,67.737) v1(30.073,67.737)
  other v1: 26,28.4 32.5,28.9 27,33.4 29.5,34.1 35.1,39.452 26.4,40.9 32.7,41.375 30.1,48.4 27.675,52.175 29.4,53.75 34.675,83.325 26.2,88.7 33.6,93.9 33.7,98.6
I2C1_SCL: R1.2 U1.7 U5.29 | length 50.7
  Component Side w0.2: v1(26.4,36.2) 25.7,35.5 25.7,32 26.3,31.4 26.6,31.4 26.875,31.125 26.875,29.719 R1.2 ; R1.2@27.253,29.416 27.378,29.416 27.978,30.016 29.553,30.016 29.646,29.923 U1.7 ; v1(30.9,72.1) 30.923,72.077 U5.29
  Solder Side w0.2: v1(26.4,36.2) 25.9,36.7 25.9,58.769 28.1,60.969 28.1,62.35 27.675,62.775 27.675,66.475 28.725,67.525 28.725,69.925 v1(30.9,72.1)
I2C1_SDA: R2.2 U1.1 U5.30 | length 47.9
  Component Side w0.2: v1(26.3,35.1) 26.2,35 26.2,32.1 26.5,31.8 26.9,31.8 27.525,31.175 R2.2 27.884,30.341 28.553,30.341 28.653,30.441 28.653,30.844 U1.1 ; v1(30.1,72.3) 30.423,71.977 U5.30
  Solder Side w0.2: v1(26.3,35.1) 25.575,35.825 25.575,58.903 27.7,61.028 27.7,62.2 27.325,62.575 27.325,66.625 28.4,67.7 28.4,70.1 30.1,71.8 v1(30.1,72.3)
I2C2_SCL: R3.2 U2.7 U5.3 | length 26.3
  Component Side w0.2: v1(27.2,71.6) 26.725,71.125 26.725,70.175 27.138,69.762 28.03,69.762 28.205,69.587 U5.3 ; R3.2@27.807,82.118 v1(28.3,82.118) 28.3,84.4 28.798,84.898 ; 28.898,84.898 30.002,84.898 30.215,84.685 U2.7
  Solder Side w0.2: v1(27.2,71.6) 27.64,71.6 30.415,74.375 32.535,74.375 33.025,74.865 33.025,77.435 32.435,78.025 31.635,78.025 30.825,78.835 30.825,79.115 29.315,80.625 28.875,80.625 28.3,81.2 v1(28.3,82.118)
I2C2_SDA: R4.2 U2.1 U5.2 | length 26
  Component Side w0.2: v1(27.2,70.7) 27.2,70.2 27.313,70.087 U5.2 ; v1(28.947,81.225) 27.8,81.225 R4.2 27.4,81.4 27,81.8 27,82.8 27.209,83.009 27.509,83.009 27.8,83.3 27.8,84.4 U2.1@29.1,85.7
  Solder Side w0.2: v1(27.2,70.7) 30.55,74.05 32.669,74.05 33.35,74.731 33.35,77.569 32.569,78.35 31.769,78.35 31.15,78.969 31.15,79.25 29.4,81 29.172,81 v1(28.947,81.225)
I2C3_SCL: J2.3 J3.4 R5.2 U3.7 U5.18 | length 27.9
  Component Side w0.2: v1(27.3,98.3) 27.3,97.025 R5.2 29.9,96.4 30.115,96.185 U3.7 ; U5.18 33.893,67.587 34.305,67.175 v1(34.43,67.175)
  Solder Side w0.2: v1(27.3,98.3) 28.025,97.575 29.975,97.575 30.6,98.2 J2.3 ; J3.4 31.2,80.2 31.8,79.6 31.8,79.238 32.038,79 32.86,79 34.76,77.1 34.775,77.1 34.775,67.52 v1(34.43,67.175) v1@34.575,67.175
I2C3_SDA: J2.4 J3.3 R6.2 U3.1 U5.28 | length 18.9
  Component Side w0.2: v1(28.1,98.3) 28.1,97.675 R6.2 28.325,97.1 U3.1 ; U5.28 31.423,71.723 31.9,72.2 v1(31.9,72.3)
  Solder Side w0.2: v1(28.1,98.3) 28.5,97.9 29.7,97.9 30.1,98.3 J2.4 ; J3.3 30.7,80.2 31.475,79.425 31.475,79.104 31.904,78.675 32.725,78.675 33.7,77.7 33.7,74.1 v1(31.9,72.3)
K_DEL_CC1: D3.1 D6.1 Q2.3 | length 12.3
  Component Side w0.2: v1(30.1,26.4) 30.1,26.7 30.516,27.116 D6.1@31.233,27.116 ; v1(31.8,32) 31.4,32 31.133,32.268 D3.1 32.553,32.916 32.869,33.232 Q2.3
  Solder Side w0.2: v1(30.1,26.4) 30.2,26.4 31.8,28 v1(31.8,32)
K_DEL_CC2: D2.1 D5.1 Q1.3 | length 19.1
  Component Side w0.2: Q1.3 v1(30.984,89.816) 31.48,89.32 D5.1 ; D5.1@30.6,87.7 D5.1 ; D2.1@31.58,82 32,82 33,83 33.425,83 v1(33.9,83.475) ; D5.1@32.2,87.7 D5.1
  Solder Side w0.2: v1(30.984,89.816) 30.984,89.716 32.1,88.6 32.1,84.16 32.785,83.475 v1(33.9,83.475) v1@33.975,83.475
K_DEL_CC3: D4.1 D7.1 J2.6 J3.1 Q3.3 | length 18.3
  Component Side w0.2: v1(26.5,83.1) 26.987,83.587 Q3.3 ; v1(28.3,99.3) 29.225,98.375 31.625,98.375 31.9,98.1 32.6,98.1 ; D4.1 32.2,93.4 33.25,94.45 33.25,96.85 32.525,97.575 32.525,98.025 32.6,98.1 ; D7.1@31.9,99.4 32.45,99.4 32.9,98.95 32.9,98.4 32.6,98.1
  Solder Side w0.2: v1(26.5,83.1) 26.9,83.5 27.6,83.5 29.1,82 J3.1 ; v1(28.3,99.3) J2.6@29,99.3
LED_BLU: R20.1 U5.25 | length 0.9
  Component Side w0.2: U5.25 32.923,71.704 33.119,71.9 R20.1@33.3,71.9
LED_YLW: R19.1 U5.13 | length 9.8
  Component Side w0.2: v1(31.3,65.6) 31.3,65.654 31.346,65.7 31.423,65.623 U5.13 ; v1(33.6,71.3) 34,71.3 34.3,71.6 R19.1@34.3,72.275
  Solder Side w0.2: v1(31.3,65.6) 31.7,66 31.7,70.5 32.5,71.3 v1(33.6,71.3)
MOT_EN: R31.1 U5.20 | length 41.8
  Component Side w0.2: R31.1 33.45,37.45 34.1,36.8 34.5,36.8 v1(34.8,36.5) ; U5.20 34.318,68.587 v1@34.293,68.562
  Solder Side w0.2: v1@34.293,68.562 33.762,68.562 33.2,68 33.2,65.79 32.2,64.79 32.2,63.9 33,63.1 33,61.6 32.7,61.3 32.275,61.3 31.925,61.65 31.075,61.65 29.675,60.25 29.675,57.041 28.875,56.241 28.875,43.325 29.6,42.6 29.6,41.7 v1(34.8,36.5)
  other v1: 34.23,68.562
MOT_NSLEEP: R33.1 U5.12 | length 24.3
  Component Side w0.2: U5.12 30.923,65.923 30.825,65.825 30.825,65.398 31.305,64.918 31.305,64.227 31.3,64.222 v1(31.3,60.7) ; v1(33.1,45.9) 33.4,45.6 34,45.6 34.6,45 R33.1
  Solder Side w0.2: v1(31.3,60.7) 30.338,59.738 30.338,56.47 31.65,55.158 31.65,49.75 33.1,48.3 v1(33.1,45.9)
MOT_PH: R32.1 U5.27 | length 2.2
  Component Side w0.2: U5.27 31.923,71.623 32.4,72.1 32.4,72.525 R32.1
NetC2_2: C2.2 R7.2 U1.8 | length 2.3
  Component Side w0.2: R7.2@27.428,28.316 C2.2 28.453,28.416 28.676,28.639 U1.8
NetC4_2: C4.2 R8.2 U2.8 | length 7.2
  Component Side w0.2: v1(29.2,82.9) 29.2,82.85 29.175,82.825 29.1,82.9 v1@29.2,83 ; C4.2 v1@29.2,83 ; C4.2@29.245,83.355 U2.8 ; v1(30.7,85) R8.2@33.2,85 ; v1@29.2,83 v1(29.2,82.9) 29.3,82.9 v1@29.2,83
  Solder Side w0.2: v1(29.2,82.9) 29.2,83.45 29.175,83.475 v1(30.7,85)
NetC6_2: C6.2 R9.2 U3.8 | length 2.1
  Component Side w0.2: R9.2 28.625,94.5 28.9,94.5 C6.2 U3.8@29.1,95.655
NetC11_2: C11.2 C12.2 FB2.2 U4.3 | length 10.5
  Component Side w0.2: C12.2@30.665,64.575 U4.3 30.665,60.435 31.1,60 33.005,60 C11.2 34.58,61.575 FB2.2@34.58,60.15
NetC16_2: C16.2 FB3.2 U5.5 | length 2.7
  Component Side w0.2: FB3.2@26.23,68.4 26.505,68.675 27.625,68.675 27.713,68.587 U5.5
NetC23_2: C23.2 R30.1 R34.2 U7.3 | length 5.1
  Component Side w0.2: R30.1@32.478,46.875 R34.2@33.578,46.875 ; C23.2 33.93,46.523 R34.2@33.578,46.875 ; U7.3 34.08,49.025 34.53,48.575 34.53,47.575 33.83,46.875 R34.2@33.578,46.875
NetD8_2: D8.2 R19.2 | length 0.9
  Component Side w0.2: R19.2 D8.2@34.3,74.3
NetD9_2: D9.2 R20.2 | length 3.5
  Component Side w0.2: R20.2 D9.2@33.5,76.9
NetJ6_1: J6.1 pad.3@27.604,41.811 U6.2 | length 4.6
  Component Side w0.3: pad.3@27.604,41.811 28.804,41.811 29.115,41.5 J6.1 30.8,41.5 31.075,41.225 U6.2@31.969,41.225
NetJ6_2: J6.2 pad.3@27.604,39.911 U6.3 | length 4.7
  Component Side w0.3: pad.3@27.604,39.911 28.904,39.911 29.243,40.25 J6.2 30.75,40.25 31.225,40.725 U6.3@31.969,40.725
NetJ8_3: J8.3 R37.2 | length 7.6
  Component Side w0.2: J8.3 28.66,34.04 29.1,33.6 31.9,33.6 32.5,34.2 32.5,36.075 R37.2
NetL1_1: L1.1 U7.5 | length 1.3
  Component Side w0.3: L1.1 32.18,53.023 U7.5@32.18,51.725
NetQ1_1: Q1.1 R13.2 R16.2 | length 5.2
  Component Side w0.2: R13.2 26.741,87.784 Q1.1 27.163,88.9 R16.2
NetQ2_1: Q2.1 R14.2 R17.2 | length 2.8
  Component Side w0.2: Q2.1 32.9,30.344 R17.2 R14.2
NetQ3_1: Q3.1 R15.2 R18.2 | length 7.6
  Component Side w0.2: Q3.1 28.536,86.3 29.74,86.3 30.34,86.9 32.328,86.9 33.1,87.672 R15.2 33.1,87.9 32.125,88.875 R18.2
NetR24_2: R24.2 U5.10 | length 2.6
  Component Side w0.2: R24.2@28.555,64.575 28.775,64.575 29.923,65.723 U5.10
NetR25_2: R25.2 U5.9 | length 1.5
  Component Side w0.2: R25.2@28.655,65.575 29.23,65.575 29.423,65.768 U5.9
NetR31_2: R31.2 R36.2 U6.5 | length 2.8
  Component Side w0.2: R36.2 33.2,38.7 33.475,38.975 33.475,39.75 33.639,39.914 U6.5@33.639,40.225
NetR32_2: R32.2 R35.2 U6.6 | length 45.9
  Component Side w0.2: v1(26.7,55.082) 26.2,54.582 26.2,46.5 26.9,45.8 29.5,45.8 30.825,44.475 30.825,42.975 v1(30.9,42.9) ; R32.2@30.675,72.9 30.8,72.9 v1(31.1,73.2) ; U6.6 34.047,40.725 34.229,40.543 34.229,39.175 R35.2@34.704,38.7
  Solder Side w0.2: v1(26.7,55.082) 26.45,55.332 26.45,58.75 28.425,60.725 28.425,62.65 28.025,63.05 28.025,66.35 29.05,67.375 29.05,69.75 30.8,71.5 31.2,71.5 31.4,71.7 31.4,72.9 v1(31.1,73.2) ; v1(30.9,42.9) 32.65,42.9 33.825,41.725 33.825,39.475 v1@34.1,39.475
  other v1: 34.05,39.475
NetR33_2: R33.2 U6.7 | length 6.8
  Component Side w0.2: R33.2@33.1,44.775 v1(33.1,44.9) ; R33.2@33.2,45 R33.2 ; U6.7@33.639,41.225 33.641,41.227 34.098,41.227 34.727,40.598 v1(34.725,40.597)
  Solder Side w0.2: v1(33.1,44.9) 33.272,44.9 34.727,43.445 34.725,43.443 v1(34.725,40.597)
NetU1_3: U1.3 U1.4 | length 2.2
  Component Side w0.2: U1.3 30.616,31.379 30.853,31.616 31.353,31.616 31.553,31.416 31.553,30.9 U1.4
NetU2_3: U2.3 U2.4 | length 1
  Component Side w0.2: U2.3 U2.4
NetU3_3: U3.3 U3.4 | length 2
  Component Side w0.2: U3.3 31.085,97.585 31.2,97.7 31.9,97.7 32.055,97.545 U3.4
SIGOUT1: J5.5 R27.1 | length 4.5
  Component Side w0.2: R27.1@28.2,55.825 30,54.025 30,52.38 J5.5
SIGOUT1_R: R27.2 U5.15 | length 15.7
  Component Side w0.2: R27.2@28.062,57.262 R27.2@28.337,57.262 ; R27.2 28.815,57.225 29.215,56.825 29.625,56.825 30,57.2 30,59.3 30.3,59.6 33.6,59.6 v1(33.8,59.8) ; U5.15 32.423,65.477 v1(33,64.9)
  Solder Side w0.2: v1(33,64.9) 33,64.1 33.8,63.3 v1(33.8,59.8)
SIGOUT2: J5.6 R26.1 | length 2.4
  Component Side w0.2: J5.6 R26.1@27.26,55.825
SIGOUT2_R: R26.2 U5.11 | length 11.7
  Component Side w0.2: R26.2 27.2,57.425 27.2,59.2 27.475,59.475 28.975,59.475 30.275,60.775 30.275,61.65 30.03,61.895 30.03,65.33 30.423,65.723 U5.11
pads on no net: J2.Z1 J2.Z2 J3.Z1 J6.Z1 J6.Z2 U1.2 U2.2 U3.2 U4.5
copper on no net: | length 5.7
  Component Side w0.2: 29,97.9 29.8,97.9 30.115,97.585 30.115,97.1 ; 29.053,31.816 29.553,31.816 29.646,31.723 29.646,30.867 ; 30.215,85.7 30.215,86.315 30.4,86.5 31.5,86.5 32,86.5

## Polygon pours and split planes (outlines as drawn)
GND on Component Side "GND_Top" (solid, remove dead copper, pour order 1): 25,28.3 36,28.3 36,64.9 25,64.9
GND on Solder Side "GND_Bot" (solid, remove dead copper, pour order 2): 25,25 36,25 36,100.5 25,100.5
3L on Ground Plane (split plane): 35.19,63.202 33.342,63.202 31.802,64.742 31.802,66.158 32.972,67.328 32.994,67.361 33.002,67.4 33.002,69 33.002,69.658 33.372,70.028 33.394,70.061 33.402,70.1 33.402,75.658 33.642,75.898 35.19,75.898
GND on Ground Plane (split plane): 202 vertices, not listed, extent 25.71,26.01 35.19,99.69
3L on Ground Plane (split plane): 27.298,82.158 27.298,81.042 26.528,80.272 26.506,80.239 26.498,80.2 26.498,74 26.498,68 26.506,67.961 26.528,67.928 26.828,67.628 27.598,66.858 27.598,65.2 27.606,65.161 27.628,65.128 28.198,64.558 28.198,61.642 27.558,61.002 26.642,61.002 26.172,61.472 26.139,61.494 26.1,61.502 25.71,61.502 25.71,82.598 26.858,82.598
5L on Ground Plane (split plane): 26.528,60.828 26.561,60.806 26.6,60.798 27.198,60.798 27.198,60.3 27.198,60.042 26.728,59.572 26.706,59.539 26.698,59.5 26.698,58.856 26.706,58.817 26.728,58.784 27.384,58.128 27.417,58.106 27.456,58.098 29.958,58.098 30.328,57.728 30.361,57.706 30.4,57.698 31.658,57.698 32.098,57.258 32.098,56.142 31.858,55.902 30.742,55.902 29.972,56.672 29.372,57.272 29.339,57.294 29.3,57.302 25.71,57.302 25.71,61.298 26.058,61.298
5L on Power Plane (split plane): 32.298,57.358 32.298,56.542 31.328,55.572 31.306,55.539 31.298,55.5 31.298,49.1 31.306,49.061 31.328,49.028 33.328,47.028 34.073,46.283 34.073,42.767 31.428,40.122 31.406,40.089 31.398,40.05 31.398,38 31.406,37.961 31.428,37.928 32.098,37.258 32.098,33.8 32.106,33.761 32.128,33.728 32.798,33.058 32.798,31.642 32.528,31.372 32.058,30.902 27.942,30.902 27.102,31.742 27.102,33.108 27.472,33.478 27.494,33.511 27.502,33.55 27.502,36 27.502,37.058 29.272,38.828 29.294,38.861 29.302,38.9 29.302,42.5 29.294,42.539 29.272,42.572 28.602,43.242 28.602,56.758 29.842,57.998 31.658,57.998
3L on Power Plane (split plane): 35.19,26.01 26.802,26.01 26.772,26.093 26.696,26.253 26.605,26.406 26.499,26.548 26.38,26.68 26.248,26.799 26.106,26.905 25.953,26.996 25.793,27.072 25.71,27.102 25.71,64.598 33,64.598 33.039,64.606 33.072,64.628 34.142,65.698 35.19,65.698
3L on Power Plane (split plane): 34.19,94.117 34.147,94.097 33.994,94.005 33.852,93.899 33.72,93.78 33.601,93.648 33.495,93.506 33.404,93.353 33.328,93.193 33.268,93.026 33.264,93.011 31.8,93.011 31.795,93.01 31.631,93.001 31.464,92.973 31.301,92.926 31.145,92.861 30.996,92.779 30.858,92.681 30.732,92.568 30.619,92.442 30.521,92.304 30.439,92.155 30.374,91.999 30.327,91.836 30.299,91.669 30.29,91.5 30.299,91.331 30.327,91.164 30.374,91.001 30.439,90.845 30.521,90.696 30.619,90.558 30.732,90.432 30.858,90.319 30.996,90.221 31.145,90.139 31.301,90.074 31.464,90.027 31.631,89.999 31.798,89.99 31.8,89.99 33.264,89.99 33.268,89.975 33.328,89.807 33.404,89.647 33.495,89.494 33.601,89.352 33.72,89.22 33.852,89.101 33.994,88.995 34.147,88.904 34.307,88.828 34.475,88.768 34.647,88.725 34.823,88.699 35,88.69 35.177,88.699 35.19,88.7 35.19,72.202 33.317,72.202 30.602,74.917 30.602,77.4 30.594,77.439 30.572,77.472 29.172,78.872 29.139,78.894 29.1,78.902 28.1,78.902 28.061,78.894 28.028,78.872 27.228,78.072 27.206,78.039 27.198,78 27.198,68.642 26.658,68.102 25.71,68.102 25.71,89.99 28,89.99 28.002,89.99 28.169,89.999 28.336,90.027 28.499,90.074 28.655,90.139 28.804,90.221 28.942,90.319 29.068,90.432 29.181,90.558 29.279,90.696 29.361,90.845 29.426,91.001 29.473,91.164 29.501,91.331 29.51,91.5 29.501,91.669 29.473,91.836 29.426,91.999 29.361,92.155 29.279,92.304 29.181,92.442 29.068,92.568 28.942,92.681 28.804,92.779 28.655,92.861 28.499,92.926 28.336,92.973 28.169,93.001 28.005,93.01 28,93.011 26.41,93.011 26.41,98.464 26.425,98.468 26.593,98.528 26.753,98.604 26.906,98.695 27.048,98.801 27.18,98.92 27.299,99.052 27.405,99.194 27.496,99.347 27.572,99.507 27.632,99.675 27.636,99.69 34.19,99.69
3L_UC on Power Plane (split plane): 30.398,77.358 30.398,74.875 30.406,74.836 30.428,74.803 33.203,72.028 33.236,72.006 33.275,71.998 35.19,71.998 35.19,65.902 34.1,65.902 34.061,65.894 34.028,65.872 32.958,64.802 25.71,64.802 25.71,67.898 26.7,67.898 26.739,67.906 26.772,67.928 27.372,68.528 27.394,68.561 27.402,68.6 27.402,77.958 28.142,78.698 29.058,78.698

## Other copper
Ground Plane (plane layer: these items are gaps in the copper):
  rectangle: 25.71,82.802 26.025,83.5
  lines w0.2: 25.2,57.4 25.4,57.2 29.3,57.2 29.9,56.6 30.7,55.8 31.9,55.8 32.2,56.1 32.2,57.3 31.7,57.8 30.4,57.8 30,58.2 27.456,58.2 26.8,58.856 26.8,59.5 27.3,60 27.3,60.3 ; 25.2,61.4 26.1,61.4 26.6,60.9 27,60.9 27.6,60.9 28.3,61.6 28.3,64.6 27.7,65.2 27.7,66.9 26.9,67.7 26.6,68 26.6,74 26.6,80.2 27.4,81 27.4,82.2 26.9,82.7 25.4,82.7 ; 25.4,65.8 25.4,71.1 ; 27.3,60.9 27.3,60.3 ; 35.4,63.1 33.3,63.1 31.7,64.7 31.7,66.2 32.9,67.4 32.9,69 32.9,69.7 33.3,70.1 33.3,75.7 33.6,76 35.4,76 ; 27.3,60.3 27.3,60.3
Power Plane (plane layer: these items are gaps in the copper):
  rectangle: 29.9,67.475 32.5,70.15
  lines w0.2: 25.4,64.7 33,64.7 34.1,65.8 35.4,65.8 ; 25.5,68 26.7,68 ; 35.4,72.1 33.275,72.1 30.5,74.875 30.5,77.4 29.1,78.8 28.1,78.8 27.3,78 27.3,68.6 26.7,68 ; 26.7,68 26.7,68 ; 33.4,47.1 33.4,47.1 ; 33.4,47.1 34.175,46.325 34.175,42.725 31.5,40.05 31.5,38 32.2,37.3 32.2,33.8 32.9,33.1 32.9,31.6 32.6,31.3 32.1,30.8 28.1,30.8 27.9,30.8 27,31.7 27,33.15 27.4,33.55 27.4,36 27.4,37.1 29.2,38.9 29.2,42.5 28.5,43.2 28.5,56.8 29.8,58.1 31.7,58.1 32.4,57.4 32.4,56.5 31.4,55.5 31.4,49.1 33.4,47.1

## Silkscreen, mask and mechanical layers (free items; w line width, h text height)
Mechanical 1:
  lines w0.254: 25.2,26.696 cw(c25.1,25.4) 26.396,25.5 ; 25.2,26.696 25.2,90.5 28,90.5 ccw(c28,91.5) 28,92.5 25.9,92.5 25.9,98.9 ccw(c25.9,100.2) 27.2,100.2 34.7,100.2 34.7,93.784 ; 26.398,25.5 35.7,25.5 35.7,89.4 ; 34.704,93.766 ccw(c35,92.5) 33.7,92.5 31.8,92.5 ccw(c31.8,91.5) 31.8,90.5 33.7,90.5 ccw(c35,90.5) 35.698,89.403

## Text inside footprints (layer, text, board x,y; h text height)
C10: Bottom Overlay "+" at 32.851,47.258 h1 r225
J5: Top Overlay "1" at 30.181,44.941 h0.8 r90; Top Overlay "6" at 27.641,55.355 h0.8 r90
J8: Bottom Overlay "SIG / +5V / GND" at 34.3,28 h1.3 r90